# Altium PCB Battery_Charger_BQ24650.PcbDoc (part 2 of 2)
Units mm, origin at the board's own origin, x right, y up, seen from the top; angles counter-clockwise.
Board outline 55 x 60 mm, 2 copper layers (Top Layer, Bottom Layer), stack 1.135 mm thick; 79 components, 33 nets, 199 pads, 65 vias.
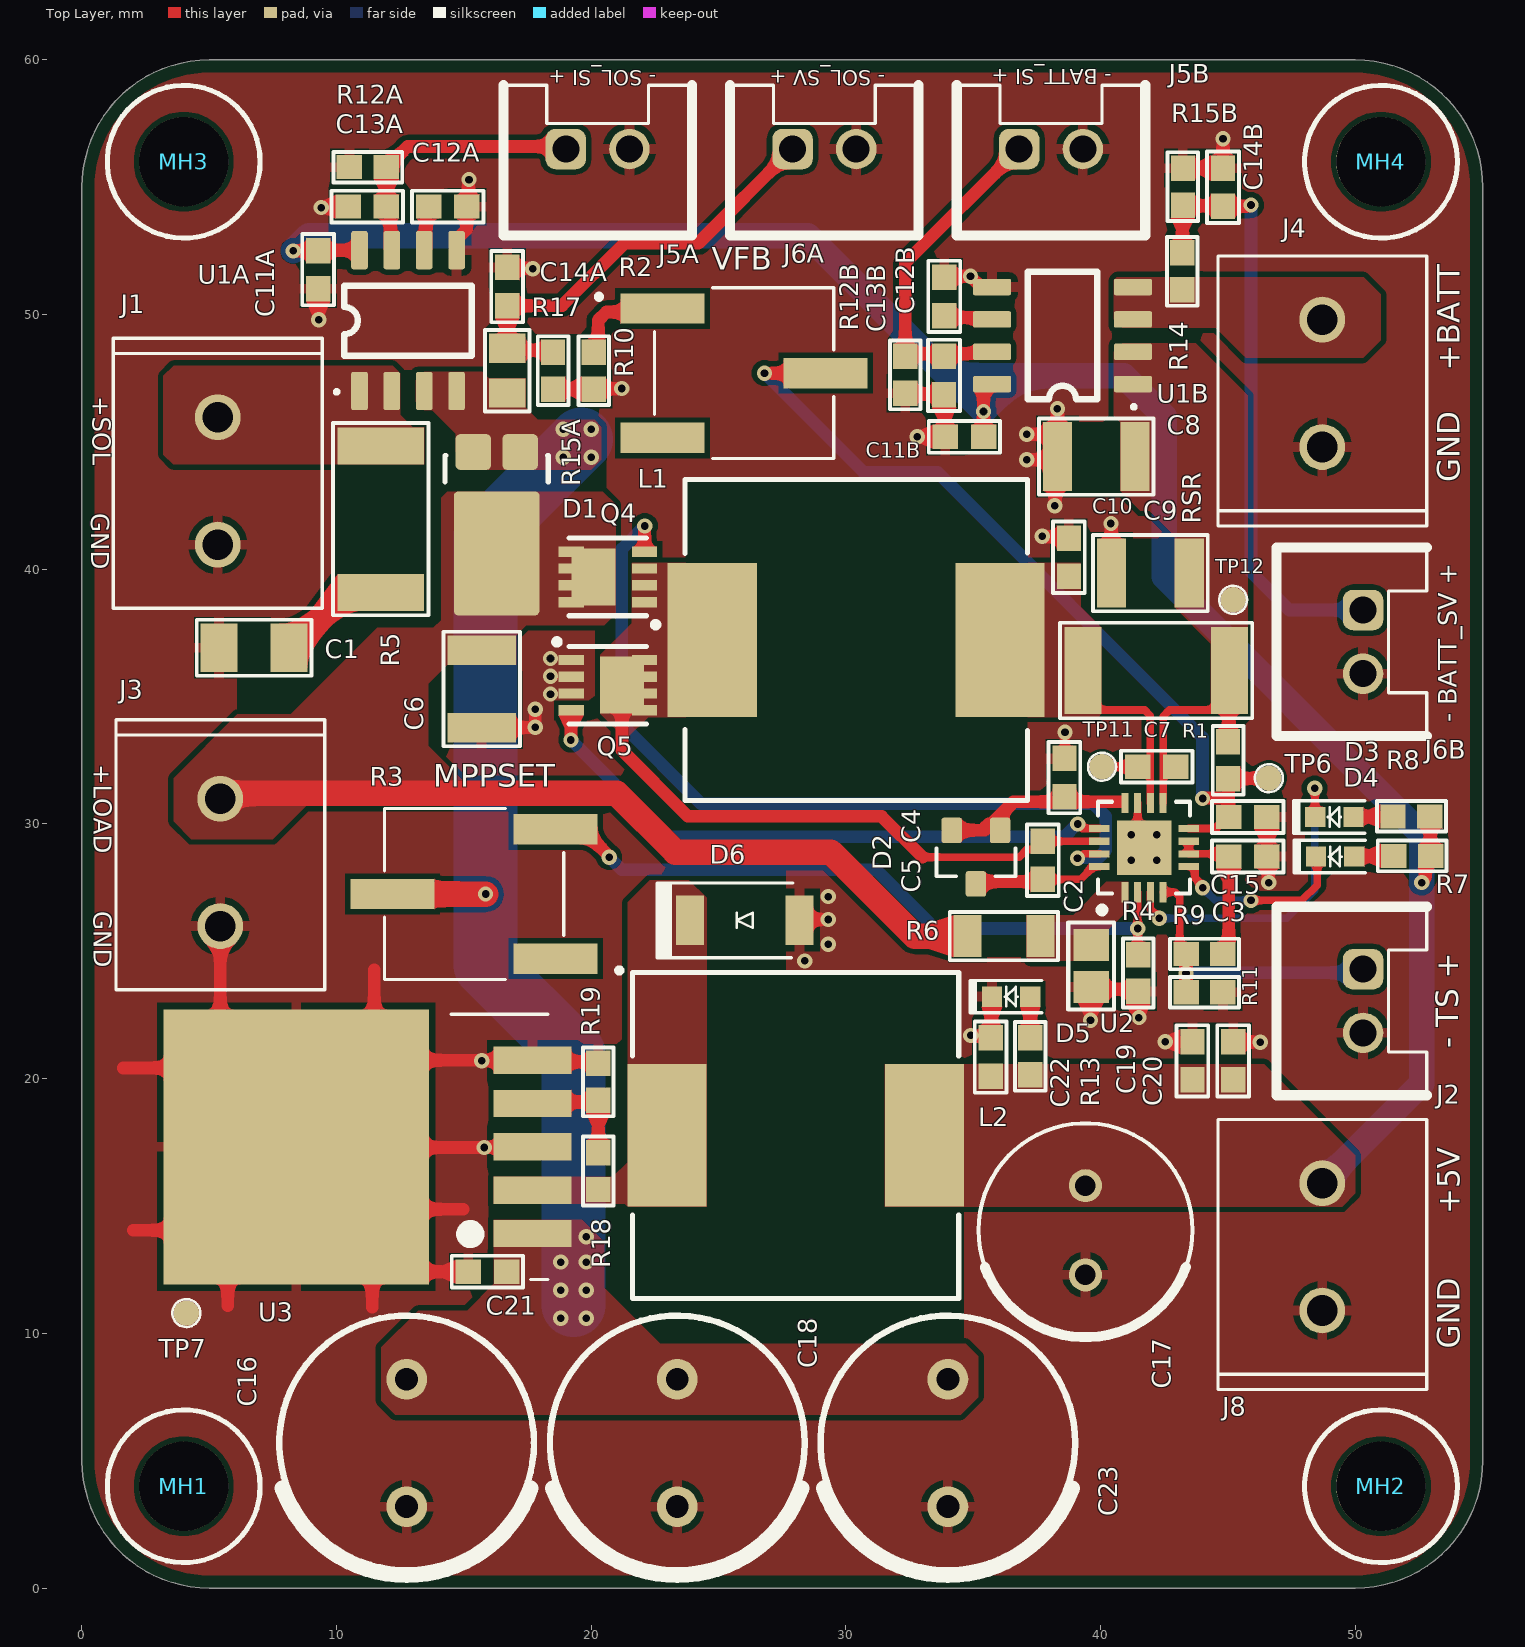
[diagram p0: Top Layer view]

## Part data (continued)
R11: library part "Res 430kΩ 0603(1608) 1% 0.1W_RMCF0603FT430K", "Res Thick Film 0603 430kΩ 1% 1/10W ±100ppm/°C Molded SMD SMD Paper T/R", Case Code (Imperial)=0603, Case Code (Metric)=1608, Manufacturer="Stackpole Electronics", Max Operating Temperature=155°C, Max Power Dissipation=100mW, Min Operating Temperature=-55°C, Package Quantity=5000, Supplier Part Number=RMCF0603FT430KCT-ND, Temperature Coefficient=100ppm/°C, Tolerance=1%, Voltage Rating=75V, Case/Package=0603, Category="Chip SMD Resistors", ComponentLink1Description=DataSheet, ComponentLink1URL=https://www.seielect.com/catalog/sei-rmcf_rmcp.pdf, ComponentLink2Description=Digikey, ComponentLink2URL=https://www.digikey.com/en/products/detail/stackpole-electronics-inc/RMCF0603FT430K/1714043, ComponentLink3Description=Mouser, ComponentLink3URL=https://eu.mouser.com/ProductDetail/SEI-Stackpole/RMCF0603FT430K?qs=IPgv5n7u5QYVDse0RIO5pw%3D%3D, Contact Plating=Tin,Matte, Features="Automotive AEC-Q200", Height=0.022inch, Length=0.061inch, Manufacturer Part Number=RMCF0603FT430K, Mounting Technology="Surface Mount", Number of Terminations=2, Packaging="Tape and Reel", Pricing="1=0.1, 10=0.015, 50=0.0092, 100=0.0075, 500=0.0049, 1000=0.00415 (USD)", Radiation Hardening=No, RoHS=Yes, RoHS Compliant=Yes, Series=RMCF, Stock=16624, Supplier=Digikey, Width=0.031inch
R12A R12B R14: library part "Res 10kΩ 0603(1608) 1% 0.1W_RK73H1JTTD1002F", "Resistor Thick Film 0603 10K Ohm 1% 1/10W ±100ppm/°C SMD Punched Paper Tape and Reel", Case Code (Imperial)=0603, Case Code (Metric)=1608, Manufacturer="KOA Speer", Max Operating Temperature=155°C, Max Power Dissipation=100mW, Min Operating Temperature=-55°C, Package Quantity=5000, Ratings=AEC-Q200, Resistance Tolerance=1%, Resistor Type="Thick Film", Supplier Part Number 1=2019-RK73H1JTTD1002FCT-ND, Temperature Coefficient=100ppm/°C, Voltage Rating=50V, Case/Package=0603, Category="Chip SMD Resistors", ComponentLink2Description=DataSheet, ComponentLink2URL=https://www.koaspeer.com/pdfs/RK73H.pdf, ComponentLink4Description=Digikey, ComponentLink4URL=https://www.digikey.com/en/products/detail/koa-speer-electronics-inc/RK73H1JTTD1002F/9844954, ComponentLink5Description=Mouser, ComponentLink5URL=https://eu.mouser.com/ProductDetail/KOA-Speer/RK73H1JTTD1002F?qs=%252BHd4ebZ%252Bq6V15kIYdKv25A%3D%3D, Construction=Rectangular, Depth=0.8mm, Features="Moisture Resistant,Automotive AEC-Q200", Height=0.45mm, Lead Free="Lead Free", Length=1.6mm, Manufacturer Part Number=RK73H1JTTD1002F, Military Standard=Not, Number of Terminations=2, Packaging="Tape and Reel", Pins=2, Power Rating=100mW, Pricing 1="1=0.1, 10=0.026, 100=0.0105, 1000=0.00472, 2500=0.0041 (USD)", Pricing 2="1=0.1, 10=0.013, 50=0.013, 100=0.008, 1000=0.005, 10000=0.004 (USD)", Reach SVHC Compliant=Unknown, RoHS=Yes, RoHS Compliant=Yes, Series=RK73H, Stock 1=3368554, Stock 2=680823, Supplier 1=Digi-Key, Supplier 2=Mouser, Supplier Part Number 2=660-RK73H1JTTD1002F, Termination=SMD/SMT, Tolerance=1%, Voltage Rating (DC)=50V, Width=0.8mm
R15A R15B: library part "Res 2kΩ 0603(1608) 0.5% 0.1W RC0603DR-072KL", "2 kOhms ±0.5% 0.1W, 1/10W Chip Resistor 0603 (1608 Metric) Moisture Resistant Thick Film", Case/Package=0603, Manufacturer=Yageo, Max Operating Temperature=155°C, Max Power Dissipation=100mW, Min Operating Temperature=-55°C, Supplier Part Number 1=13-RC0603DR-072KLCT-ND, Temperature Coefficient=100ppm/°C, Tolerance=0.5%, Category="Chip SMD Resistors", ComponentLink1Description=DataSheet, ComponentLink1URL=https://www.yageo.com/upload/media/product/productsearch/datasheet/rchip/PYu-RC_Group_51_RoHS_L_12.pdf, ComponentLink2Description=Digikey, ComponentLink2URL=https://www.digikey.com/en/products/detail/yageo/RC0603DR-072KL/5917988, Features="Moisture Resistant", Height=0.022inch, Length=0.063inch, Manufacturer Part Number=RC0603DR-072KL, Number of Terminations=2, Packaging="Tape and Reel", Pricing 1="1=0.1, 10=0.034, 50=0.0222, 100=0.0187, 500=0.01302, 1000=0.01133 (USD)", RoHS=Yes, RoHS Compliant=Yes, Series=RC, Stock 1=24993, Supplier 1=Digi-Key, Width=0.031inch
R17: library part "Res 24.9kΩ 0805(2012) 1% 1/4W_RK73H2ATTD2492F", "Res Thick Film 0805 24.9kΩ 1% 0.25W(1/4W) ±100ppm/C Pad SMD Automotive T/R", Case Code (Imperial)=0805, Case Code (Metric)=2012, Manufacturer="KOA Speer", Max Operating Temperature=155°C, Min Operating Temperature=-55°C, Package Quantity=5000, Power Rating=125mW, Supplier Part Number 1=2019-RK73H2ATTD2492FCT-ND, Temperature Coefficient=100ppm/°C, Tolerance=1%, Voltage Rating=150V, Case/Package=0805, Category="Chip SMD Resistors", ComponentLink1Description=DataSheet, ComponentLink1URL=https://www.koaspeer.com/pdfs/RK73H.pdf, ComponentLink2Description=Digikey, ComponentLink2URL=https://www.digikey.com/en/products/detail/koa-speer-electronics-inc/RK73H2ATTD2492F/10234069, ComponentLink3Description=Mouser, ComponentLink3URL=https://eu.mouser.com/ProductDetail/KOA-Speer/RK73H2ATTD2492F?qs=V1Gdg3MQOGsrJO3v1jKV%252Bg%3D%3D, Construction=Rectangular, Depth=1.25mm, Height=0.5mm, Lead Free="Lead Free", Length=2mm, Manufacturer Part Number=RK73H2ATTD2492F, Military Standard=Not, Packaging="Tape and Reel", Pricing 1="1=0.1, 10=0.031, 50=0.0192, 100=0.016, 500=0.0108, 1000=0.00929 (USD)", Pricing 2="1=0.1, 10=0.018, 50=0.018, 100=0.01, 1000=0.008, 10000=0.005 (USD)", RoHS=Yes, RoHS Compliant=Yes, Series=RK73H, Stock 1=15296, Stock 2=9628, Supplier 1=Digikey, Supplier 2=Mouser, Supplier Part Number 2=660-RK73H2ATTD2492F, Termination=SMD/SMT, Voltage Rating (DC)=150V, Width=1.25mm
R18: library part "Res 3kΩ 0603(1608) 0.5% 0.1W RT0603DRE073KL", "Res Thin Film 0603 3kΩ 0.5% 0.1W(1/10W) ±50ppm/C Pad SMD T/R", Case Code (Imperial)=0603, Case Code (Metric)=1608, Manufacturer=Yageo, Max Operating Temperature=155°C, Max Power Dissipation=100mW, Min Operating Temperature=-55°C, Supplier Part Number 1=311-2574-1-ND, Temperature Coefficient=50ppm/°C, Tolerance=0.5%, Voltage Rating=75V, Voltage Rating (DC)=50V, Case/Package=0603, Category="Chip SMD Resistors", ComponentLink1Description=DataSheet, ComponentLink1URL=https://www.yageo.com/upload/media/product/productsearch/datasheet/rchip/PYu-RT_1-to-0.01_RoHS_L_15.pdf, ComponentLink2Description=Digikey, ComponentLink2URL=https://www.digikey.com/en/products/detail/yageo/RT0603DRE073KL/1074848, Features="Moisture Resistant", Height=0.022inch, Lead Free="Lead Free", Length=0.063inch, Manufacturer Part Number=RT0603DRE073KL, Number of Terminations=2, Packaging="Tape and Reel", Power Rating=100mW, Pricing 1="1=0.11, 10=0.096, 100=0.037, 500=0.02292, 1000=0.01626, 2500=0.01404 (USD)", Pricing 2="1=0.11, 10=0.096, 50=0.096, 100=0.023, 1000=0.014, 10000=0.012 (USD)", RoHS=Yes, RoHS Compliant=Yes, Series=RT, Stock 1=9385, Stock 2=6302, Supplier 1=Digi-Key, Supplier 2=Mouser, Supplier Part Number 2=603-RT0603DRE073KL, Termination=SMD/SMT, Width=0.031inch
R19: library part "Res 1kΩ 0603(1608) 0.1% 0.1W_RN73R1JTTD1001B25", "Res Thin Film 0603 1kΩ 0.1% 0.1W(1/10W) ±25ppm/C Sulfur Resistant Pad SMD Automotive T/R", Case Code (Imperial)=0603, Case Code (Metric)=1608, Manufacturer="KOA Speer", Max Operating Temperature=155°C, Max Power Dissipation=100mW, Min Operating Temperature=-55°C, Supplier Part Number 1=2019-RN73R1JTTD1001B25CT-ND, Temperature Coefficient=25ppm/°C, Tolerance=0.1%, Case/Package=0603, Category="Chip SMD Resistors", ComponentLink1Description=DataSheet, ComponentLink1URL=https://www.koaspeer.com/pdfs/RN73R.pdf, ComponentLink2Description=Digikey, ComponentLink2URL=https://www.digikey.com/en/products/detail/koa-speer-electronics-inc/RN73R1JTTD1001B25/9991865, ComponentLink3Description=Mouser, ComponentLink3URL=https://eu.mouser.com/ProductDetail/KOA-Speer/RN73R1JTTD1001B25?qs=2WXlatMagcG9rUOLC1KorA%3D%3D, Features="Moisture Resistant", Manufacturer Part Number=RN73R1JTTD1001B25, Number of Terminations=2, Packaging="Cut Tape", Pricing 1="1=0.2, 10=0.146, 50=0.1144, 100=0.102, 500=0.07706, 1000=0.06788 (USD)", Pricing 2="1=0.2, 10=0.115, 50=0.115, 100=0.102, 1000=0.068, 10000=0.05 (USD)", RoHS=Yes, RoHS Compliant=Yes, Series=RN73R, Stock 1=20286, Stock 2=31590, Supplier 1=Digi-Key, Supplier 2=Mouser, Supplier Part Number 2=660-RN73R1JTD1001B25
RSR: library part "Res 0.01Ω 2512(6432) 1% 3W_CRA2512-FZ-R010ELF", "SMD Current Sense Resistor, 0.01Ω 1%, 3 W, 2512 [6432 Metric], Metal Alloy", Case/Package=348Case, Manufacturer=Bourns, Max Operating Temperature=170°C, Min Operating Temperature=-55°C, Supplier Part Number 1=CRA2512-FZ-R010ELFCT-ND, Tolerance=1%, Category="Chip SMD Resistors", ComponentLink1Description=DataSheet, ComponentLink1URL=https://www.bourns.com/docs/product-datasheets/cra.pdf, ComponentLink2Description=Digikey, ComponentLink2URL=https://www.digikey.com/en/products/detail/bourns-inc/CRA2512-FZ-R010ELF/1775029?s=N4IgTCBcDaIMICUCCYCsBGMBaAYgLSwQAZ0iBRAGRzgBUsA5AERAF0BfIA, ComponentLink3Description=Mouser, ComponentLink3URL=https://eu.mouser.com/ProductDetail/Bourns/CRA2512-FZ-R010ELF?qs=WqWCsLCZBkoNPiv%2FXVnYvw%3D%3D, Height=900um, Manufacturer Part Number=CRA2512-FZ-R010ELF, Packaging=13Packaging, Pins=2NUMBER, Pricing 1="1=0.64, 10=0.427, 25=0.3544, 50=0.3, 100=0.2245, 250=0.2, 500=0.16362, 1000=0.12726 (USD)", Pricing 2="1=0.64, 10=0.292, 50=0.292, 100=0.2, 1000=0.128, 10000=0.116 (USD)", RoHS=No, Stock 1=49784, Stock 2=36722, Supplier 1=Digikey, Supplier 2=Mouser, Supplier Part Number 2=652-CRA2512FZR010ELF, Width=3.2mm
TP6 TP7 TP11 TP12: library part "Misc. TP SMD 1mm DIA"
U1A U1B: library part "IC Current Sensor 5A Hall Effect SOIC-8_ACS723LLCTR-05AB-T", "High Accuracy, Galvanically Isolated Current Sensor IC With Small Footprint SOIC8 Package", Manufacturer="Allegro MicroSystems", Supplier Part Number 1=620-1641-1-ND, Bandwidth=80kHz, Category="Current Sensors", ComponentLink1Description=DataSheet, ComponentLink1URL=https://www.allegromicro.com/~/media/Files/Datasheets/ACS723-Datasheet.ashx, ComponentLink2Description=Digikey, ComponentLink2URL=https://www.digikey.com/en/products/detail/allegro-microsystems/ACS723LLCTR-05AB-T/4915376?s=N4IgTCBcDaIGxgAwFoCMcAsq3IHIBEQBdAXyA, ComponentLink3Description=Mouser, ComponentLink3URL=https://eu.mouser.com/ProductDetail/Allegro-MicroSystems/ACS723LLCTR-05AB-T?qs=pUKx8fyJudDgZZVdH2Guaw%3D%3D, Height=1.75mm, Manufacturer Part Number=ACS723LLCTR-05AB-T, Pricing 1="1=5.54, 5=4.668, 10=4.337, 25=3.936, 50=3.6574, 100=3.3989, 500=2.86738, 1000=2.66503 (USD)", Pricing 2="1=4.67, 10=3.65, 50=3.65, 100=3.4, 1000=2.67, 10000=2.39 (USD)", RoHS=Yes, RoHS Compliant=5897YesNo, Stock 1=6267, Stock 2=27382, Supplier 1=Digikey, Supplier 2=Mouser, Supplier Part Number 2=250-723LLCTR05ABT
U2: library part "IC Misc. Batt Charge_BQ24650RVAR", "Charger IC Multi-Chemistry 16-VQFN (3.5x3.5)", Manufacturer="Texas Instruments", Supplier Part Number 1=296-46287-1-ND, Category="Battery Management", ComponentLink1Description=DataSheet, ComponentLink1URL=https://www.ti.com/general/docs/suppproductinfo.tsp?distId=10&gotoUrl=https%3A%2F%2Fwww.ti.com%2Flit%2Fgpn%2Fbq24650, ComponentLink2Description=Digikey, ComponentLink2URL=https://www.digikey.com/en/products/detail/texas-instruments/BQ24650RVAR/2596772?s=N4IgTCBcDaIEIEUwBYBsBWADAJQGoEFsQBdAXyA, ComponentLink3Description=Mouser, ComponentLink3URL=https://eu.mouser.com/ProductDetail/Texas-Instruments/BQ24650RVAR?qs=0zjllh%252Bnl7YoFsOK3aOUFA%3D%3D, Manufacturer Part Number=BQ24650RVAR, Pricing 1="1=4.95, 10=4.442, 25=4.1996, 100=3.6396, 250=3.453, 500=3.09836, 1000=2.61307 (USD)", Pricing 2="1=4.94, 10=4.44, 50=4.44, 100=3.63, 1000=2.61, 10000=2.48 (USD)", RoHS=Yes, Stock 1=6655, Stock 2=7875, Supplier 1=Digi-Key, Supplier 2=Mouser, Supplier Part Number 2=595-BQ24650RVAR
U3: library part "IC PMU Buck 5V 3A TO-263_LM2596DSADJG", "Conv DC-DC 4.5V to 40V Step Down Single-Out 1.23V to 37V 3A 6-Pin(5+Tab) D2PAK Tube", Manufacturer="ON Semiconductor", Max Supply Voltage=40V, Min Supply Voltage=4.5V, Nominal Supply Current=5mA, Supplier Part Number=LM2596DSADJGOS-ND, Category="Voltage Regulators - Switching", ComponentLink1Description=DataSheet, ComponentLink1URL=https://www.onsemi.com/pdf/datasheet/lm2596-d.pdf, ComponentLink2Description=Digikey, ComponentLink2URL=https://www.digikey.com/en/products/detail/onsemi/LM2596DSADJG/2003290, ComponentLink3Description=Mouser, ComponentLink3URL=https://eu.mouser.com/ProductDetail/onsemi/LM2596DSADJG?qs=atIEnC%2F2K4W1Dy%252BFjrRjIQ%3D%3D, Halogen Free=5694HalogenFree, Lead Free=5697LeadFree, Manufacturer Part Number=LM2596DSADJG, Max Duty Cycle=95%, Pricing="1=3.53, 10=2.258, 50=1.7206, 100=1.5491, 250=1.36444, 500=1.25086, 1000=1.15572, 2500=1.09488 (USD)", RoHS=Yes, Stock=1605, Supplier=Digikey, Topology=6153TopologyType

## Via types
v1: diameter 0.6, hole 0.3, Top Layer to Bottom Layer, tented both sides, 61 vias
v2: diameter 0.3, hole 0.3, Top Layer to Bottom Layer, tented both sides, 4 vias

## Nets (pads, with @x,y where several pads share a name; then routed paths per layer and width w, separated by ;. In a path a pad name is that pad's centre, name@x,y a point inside that pad or via, vN(x,y) a via of type N, cw(c..) or ccw(c..) an arc to the next point about the centre after c; other vN are vias at no path point)
5V: C11A.1 C11B.1 C17.1 C19.2 C20.2 C22.2 J8.2 L2.1 R7.1 R8.1 R13.1 U1A.8 U1B.8 | length 86.8
  Top Layer w0.5: v1(8.3,52.5) 8.307,52.507 9.273,52.507 C11A.1 9.287,52.521 10.893,52.521 U1A.8 ; C11B.1 v1(35.4,46.198) 35.4,47.195 35.475,47.27 U1B.8 ; v1(52.6,27.7) 52.6,27.727 52.746,27.873 52.746,28.543 R7.1 ; R8.1 52.937,30.288 R7.1@52.937,28.76
  Bottom Layer w1: v1(8.3,52.5) 8.9,53.1 28.498,53.1 33.998,47.6 ; 37.25,47.6 36.802,47.6 ; J8.2 52.6,19.8 v1(52.6,27.7) 52.6,29.6 42.5,39.7 42.5,46 40.9,47.6 36.802,47.6 ; 33.998,47.6 35.479,47.6 ; 33.998,47.6 v1(35.4,46.198) ; v1(35.4,46.198) 36.802,47.6 ; v1(35.4,46.198) 35.4,47.521 35.479,47.6 ; 35.479,47.6 36.802,47.6
BTST: C5.1 D2.3 U2.16 | length 5.1
  Top Layer w0.3: C5.1 39.21,27.825 39.71,28.325 U2.16
  Top Layer w0.5: D2.3@35.1,27.738 37.637,27.738 C5.1
GND: C1.2 C2.2 C3.1 C4.1 C6.1 C8.1 C9.1 C10.1 C11A.2 C11B.2 C12A.1 C12B.1 C13A.1 C13B.1 C14A.1 C14B.1 C15.2 C16.2 C17.2 C18.2 C19.1 C20.1 C21.1 C22.1 C23.2 D5.2 D6.1 J1.2 J2.2 J3.2 J4.1 J5A.2 J5B.2 J6A.2 J6B.2 J8.1 Q5.1 Q5.2 Q5.3 R4.1 R10.2 R11.2 R12A.1 R12B.1 R15A.1 R15B.1 R19.2 TP7.1 U1A.5 U1B.5 U2.11 U2.17 U3.3 U3.5 U3.6 | length 115.6
  Top Layer w0.3: C4.1@38.575,32.375 C4.1@38.6,32.4 ; C4.1@38.6,32.6 v1(38.6,33.6) ; U2.11 41.45,29.325 U2.17
  Top Layer w0.5: 1.625,20.425 5.318,20.425 U3.6@5.435,20.308 ; 2.025,14.05 5.142,14.05 U3.6@5.725,14.633 ; J3.2@5.425,25.925 5.435,25.915 U3.6@5.435,20.308 ; 5.725,11.1 U3.6@5.725,14.633 ; C11A.2 9.28,49.847 9.3,49.827 v1(9.3,49.8) ; v1(9.4,54.2) 9.419,54.219 10.435,54.219 C13A.1 ; 11.4,11.025 U3.6@11.4,14.343 ; 11.475,24.275 U3.6@11.475,20.383 ; U1A.5 14.71,52.954 15.1,53.344 15.1,54.224 C12A.1 15.181,54.305 15.181,55.281 v1(15.2,55.3) ; 14.975,14.875 U3.6@10.868,14.875 ; C21.1 13.318,12.425 U3.6@11.4,14.343 ; v1(15.7,20.7) 15.713,20.713 17.679,20.713 U3.5 ; C6.1 15.712,33.787 17.787,33.787 v1(17.8,33.8) v1(17.8,34.5) ; C14A.1 16.731,51.819 17.681,51.819 v1(17.7,51.8) ; U3.3 17.679,17.313 15.813,17.313 v1(15.8,17.3) U3.6@8.443,17.3 ; v1(18.4,35.8) 18.427,35.8 v1@18.447,35.78 ; R15A.1 R10.2 20.112,47.088 21.188,47.088 v1(21.2,47.1) ; R19.2@20.287,20.613 R19.2 20.212,20.663 17.755,20.663 U3.5 ; D6.1 28.2,26.25 v1(29.3,26.25) ; R12B.1 32.348,46.885 33.823,46.885 C13B.1 33.874,46.834 33.874,45.226 C11B.2 v1(32.8,45.2) ; C12B.1 33.897,51.5 v1(34.89,51.5) 35.31,51.08 U1B.5 ; v1(34.9,21.7) 34.919,21.681 35.601,21.681 C22.1 35.707,21.625 35.707,23.2 D5.2 ; v1(37.1,44.3) 38.175,44.3 C8.1 ; v1(37.1,45.3) 37.975,45.3 C8.1@38.3,44.975 ; v1(37.7,41.3) 37.719,41.281 38.694,41.281 C10.1 ; v1(38.2,42.5) 38.219,42.519 38.219,44.344 C8.1 ; v1(38.3,46.3) C8.1@38.3,44.975 ; v1(39.6,22.3) 39.613,22.313 39.613,23.588 C2.2 39.713,23.513 41.387,23.513 R4.1 41.487,23.413 41.487,22.413 v1(41.5,22.4) ; v1(40.4,41.8) 40.412,41.788 40.412,39.863 C9.1 ; v1(42.538,21.448) C19.1@43.599,21.449 ; R15B.1 C14B.1 v1(44.8,56.9) ; C20.1 45.211,21.439 46.255,21.439 v1(46.266,21.429) ; C15.2 C3.1 46.581,28.669 46.581,27.719 v1(46.6,27.7) ; U3.6@5.435,20.308 U3.6 ; U3.6@5.725,14.633 U3.6 ; U3.6 U3.6@8.443,17.3 ; U3.6 U3.6@11.475,20.383 ; U3.6@8.443,17.3 U3.6@10.868,14.875 ; U3.6@10.868,14.875 U3.6@11.4,14.343 ; U3.6@11.475,20.383 11.817,20.725 U3.5 ; C8.1 C8.1@38.3,44.975
  other v1: 28.375,24.625 29.3,25.275 29.3,27.15 18.4,35.1 18.4,36.5
  other v2: 41.2,28.575 42.2,28.575 41.2,29.575 42.2,29.575
HIDRV: Q4.4 U2.15 | length 33.1
  Top Layer w0.3: v1(39.087,28.653) 39.168,28.653 39.34,28.825 U2.15
  Top Layer w0.5: Q4.4@22.092,40.8 22.092,41.692 v1(22.1,41.7)
  Bottom Layer w0.5: v1(22.1,41.7) 21.2,40.8 21.2,33.9 24.3,30.8 39.7,30.8 40.2,30.3 40.2,28.965 39.907,28.672 39.106,28.672 v1(39.087,28.653)
LODRV: Q5.4 U2.13 | length 23.7
  Top Layer w0.3: v1(39.1,30) 39.275,29.825 U2.13
  Top Layer w0.5: v1(19.2,33.3) 19.207,33.307 Q5.4@19.207,34.4
  Bottom Layer w0.5: v1(19.2,33.3) 23,29.5 38.573,29.5 39.073,30 v1(39.1,30)
MPPSET: R3.3 R4.2 U2.2 | length 26.9
  Top Layer w0.3: U2.2 v1(41.45,25.9) 41.45,24.9 R4.2
  Top Layer w0.5: R3.3 19.655,29.79 20.681,28.764 20.681,28.719 v1(20.7,28.7)
  Bottom Layer w0.5: v1(20.7,28.7) 21.2,28.2 31.2,28.2 33.5,25.9 v1(41.45,25.9)
NetC1_1: C1.1 R5.1 | length 4.6
  Top Layer w1: C1.1 8.135,37.143 8.36,37.368 8.668,37.368 10.168,38.868 11.51,38.868 R5.1
NetC2_1: C2.1 R6.1 U2.1
NetC6_2: C6.2 D1.3 J3.1 Q4.5 Q4.6 Q4.7 Q4.8 Q4.9 R6.2 | length 31.7
  Top Layer w1: J3.1@5.435,31.2 21,31.2 23.3,28.9 29.4,28.9 32.7,25.6 R6.2
NetC12A_2: C12A.2 U1A.6 | length 1.8
  Top Layer w0.5: U1A.6 13.515,52.604 13.515,54.139 C12A.2
NetC12B_2: C12B.2 U1B.6 | length 1.9
  Top Layer w0.5: C12B.2 33.932,49.885 35.66,49.885 U1B.6
NetC13A_2: C13A.2 J5A.1 R12A.2 U1A.7 | length 10.8
  Top Layer w0.5: U1A.7 12.095,52.604 12.095,54.099 C13A.2 R12A.2 11.98,55.789 12.791,56.6 J5A.1@19.04,56.6
NetC13B_2: C13B.2 J5B.1 R12B.2 U1B.7 | length 13.5
  Top Layer w0.5: U1B.7 35.66,48.465 33.848,48.465 32.428,48.465 R12B.2 32.323,52.023 J5B.1
NetC14A_2: C14A.2 J6A.1 R15A.2 R17.2 | length 17.3
  Top Layer w0.5: R15A.2 18.425,48.6 16.775,48.6 R17.2 C14A.2 18.85,50.35 21.3,52.8 24.2,52.8 J6A.1
NetC14B_2: C14B.2 J6B.1 R14.2 R15B.2 | length 24
  Top Layer w0.5: R14.2 43.212,52.437 43.212,54.287 R15B.2 43.25,54.275 44.775,54.275 C14B.2 45.823,54.25 45.873,54.3 v1(45.9,54.3)
  Bottom Layer w0.5: v1(45.9,54.3) 45.9,39.9 47.4,38.4 J6B.1
NetD3_1: D3.1 R8.2 | length 1.6
  Top Layer w0.5: D3.1 49.937,30.287 51.462,30.287 R8.2
NetD3_2: D3.2 U2.3 | length 12.9
  Top Layer w0.3: U2.3 41.95,26.65 v1(42.3,26.3) ; v1(48.4,31.4) 48.412,31.388 48.412,30.287 D3.2
  Bottom Layer w0.3: v1(42.3,26.3) 47.3,26.3 48.4,27.4 v1(48.4,31.4)
NetD4_1: D4.1 R7.2 | length 1.6
  Top Layer w0.5: D4.1 49.963,28.735 51.488,28.735 R7.2
NetD4_2: D4.2 U2.5 | length 7.3
  Top Layer w0.3: U2.5 43.69,28.325 U2.5@43.7,28.315 ; U2.5@43.7,28.3 U2.5@43.7,28.315 ; v1(44,27.5) 44,27.581 43.7,27.881 U2.5@43.7,28.315 ; v1(45.9,27) 47.9,27 48.5,27.6 48.5,28.673 D4.2
  Bottom Layer w0.3: v1(44,27.5) 44.5,27 v1(45.9,27)
NetD5_1: D5.1 R13.2 | length 1.6
  Top Layer w0.5: R13.2 D5.1
NetD6_2: D6.2 L2.2 R18.2 U3.2
NetJ4_2: J4.2 R14.1 U1B.3 U1B.4
NetR2_1: R2.1 R10.1 | length 4
  Top Layer w0.5: R10.1 20.275,48.7 20.275,49.775 20.6,50.1 22.66,50.1 R2.1
NetR18_1: R18.1 R19.1 U3.4 | length 4.7
  Top Layer w0.5: U3.4 17.755,19.088 20.212,19.088 R19.1 R18.1
PH: C5.2 L1.1 Q4.1 Q4.2 Q4.3 Q5.5 Q5.6 Q5.7 Q5.8 Q5.9 U2.14 | length 23.3
  Top Layer w0.3: 33,28.7 36.8,28.7 37.1,29 37.4,29 C5.2 ; C5.2@37.75,29.3 C5.2 ; U2.14 C5.2
  Top Layer w0.5: Q5.9 21.207,32.893 23.8,30.3 31.4,30.3 33,28.7
REGN: C4.2 D2.1 D2.2 U2.12 | length 7.2
  Top Layer w0.5: D2.2 35.45,29.75 35.45,29.85 35.6,30 35.7,30 36.575,30.875 U2.12@40.81,30.875
SRN: C7.1 C8.2 C9.2 R1.1 RSR.2 TP12.1 U1B.1 U1B.2 U2.9 | length 9.9
  Top Layer w0.3: U2.9 42.45,31.775 ; C7.1 42.925,32.25 42.45,31.775 ; RSR.2@45.05,35.05 44.475,34.475 42.7,34.475 42.45,34.225 42.45,31.775
  Top Layer w0.5: R1.1 45.025,33.25 45.025,36 RSR.2
SRP: C7.2 C10.2 L1.2 RSR.1 TP11.1 U2.10 | length 9.5
  Top Layer w0.3: RSR.1 39.3,35.05 39.875,34.475 41.725,34.475 41.95,34.25 C7.2@41.95,31.775 ; TP11.1 C7.2 41.475,32.25 C7.2@41.95,31.775 ; U2.10 C7.2@41.95,31.775
TS: J2.1 R9.2 R11.1 U2.4 | length 11.5
  Top Layer w0.3: U2.4 42.924,27.325 43.1,27.149 R9.2@43.1,24.925
  Top Layer w0.5: R11.1 v1(43.35,24.145) R9.2
  Bottom Layer w0.5: v1(43.35,24.145) 43.369,24.164 50.164,24.164 J2.1
VCC: C16.1 C18.1 C21.2 C23.1 D1.1 D1.2 R3.2 R17.1 U1A.3 U1A.4 U3.1 | length 40.6
  Top Layer w1: R3.2 v1(15.85,27.25)
  Bottom Layer w2.5: 19.3,11.1 19.3,13.8 19.3,21 15.85,24.45 15.85,41.35 19.6,45.1
  other v1: 18.8,10.6 19.8,10.6 18.8,11.7 19.8,11.7 18.8,12.8 19.8,12.8 19.8,13.8 18.9,44.4 20,44.4 18.9,45.5 20,45.5
VFB: C15.1 R1.2 R2.2 TP6.1 U2.8 | length 33.8
  Top Layer w0.3: U2.8 44.55,29.825 45,30.275 C15.1
  Top Layer w0.5: v1(26.8,47.7) R2.2 ; v1(44,31) 44.019,31.019 45.007,31.019 45.012,31.025 ; C15.1 45.012,30.287 45.012,31.025 ; TP6.1 46.587,31.788 45.012,31.788 R1.2 45.012,31.763 45.012,31.025
  Bottom Layer w0.5: v1(26.8,47.7) 30.7,43.8 33.6,43.8 44,33.4 v1(44,31)
VIN: J1.1 R5.2 U1A.1 U1A.2
Vref: C3.2 R9.1 U2.6 U2.7 | length 5.8
  Top Layer w0.3: U2.7@43.45,29.275 U2.6 C3.2@44.925,28.825 ; R9.1 R9.1@45.025,25.12
  Top Layer w0.5: R9.1@45.025,25.12 C3.2
pads on no net: MH1.1 MH2.1 MH3.1 MH4.1 R2.3 R3.1

## Polygon pours and split planes (outlines as drawn)
GND on Top Layer "GND_L01_P011" (solid, remove dead copper, pour order 11): 0,5 0,55 cw(c5,55) 5,60 50,60 cw(c50,55) 55,55 55,5 cw(c50,5) 50,0 5,0 cw(c5,5)
5V on Top Layer "5V_L01_P009" (solid, remove dead copper, pour order 9): 31.525,20.575 31.525,14.975 49.475,14.975 50,15.5 50,17 46.425,20.575 45.35,20.575
VCC on Top Layer "VCC_L01_P008" (solid, remove dead copper, pour order 8): 34.5,6.8 35.2,7.5 35.2,9.1 34.7,9.6 22.7,9.6 20.5,11.8 20.5,13.6 19.64,14.46 16.167,14.46 16.167,11.958 16.175,11.95 15.125,10.9 13.2,10.9 11.75,9.45 11.75,7.35 12.3,6.8
NetD6_2 on Top Layer "NETD6_2_L01_P007" (solid, remove dead copper, pour order 7): 23.825,27.8 22.3,27.8 21.425,26.925 21.425,16.725 20.85,16.15 16.177,16.15 16.167,16.16 16.167,15.09 21.31,15.09 21.425,14.975 24.525,14.975 24.525,27.1
NetC6_2 on Top Layer "NETC6_2_L01_P002" (solid, remove dead copper, pour order 2): 13.6,35.5 13.6,33.068 15.468,31.2 9.3,31.2 7.5,29.4 4.3,29.4 3.6,30.1 3.6,31.8 6.1,34.3 8.2,34.3 11.6,37.7 13.8,37.7 14.1,38 14.1,42.8 14.353,43.053 20.447,43.053 20.955,42.545 20.955,38.255 20.5,37.8 17.45,37.8 17.05,37.4 17.05,36.243 14.35,36.25
NetC2_1 on Top Layer "NETC2_1_L01_P010" (solid, remove dead copper, pour order 10): 41.09,27.725 41.09,26.64 40.325,25.875 40.325,24.625 37.23,24.625 37.08,24.775 37.08,26.425 38.925,26.425 40.225,27.725
SRN on Top Layer "SRN_L01_P005" (solid, remove dead copper, pour order 5): 45.775,34.325 45.775,46.825 43.735,48.865 40.84,48.865 40.515,48.54 40.515,46.035 40.775,45.775 40.775,43.075 41.55,42.3 41.9,42.3 42.9,41.3 42.9,38.5 44.325,37.075 44.325,34.325
SRP on Top Layer "SRP_L01_P006" (solid, remove dead copper, pour order 6): 34.3,34.2 39.9,34.2 40.025,34.325 40.025,37.725 39.225,38.525 39.225,40.225 39.2,40.25 34.3,40.25
NetJ4_2 on Top Layer "NETJ4_2_L01_P004" (solid, remove dead copper, pour order 4): 40.515,49.81 40.84,49.485 44.515,49.485 45.7,48.3 50.3,48.3 51,49 51,50.8 50.325,51.475 40.633,51.475 40.515,51.357
PH on Top Layer "PH_L01_P003" (solid, remove dead copper, pour order 3): 20.345,34.333 21.207,33.47 21.207,33.169 22.238,34.2 23.489,34.2 26.5,34.2 26.5,40.25 21.607,40.25 21.59,40.233 21.59,37.89 20.345,36.645
VCC on Top Layer "VCC_L01_P001" (solid, remove dead copper, pour order 1): 20.005,43.905 20.4,44.3 20.4,45.6 20.127,45.873 17.902,45.873 17.425,46.35 17.425,47.5 15.975,47.5 15.726,47.749 13.44,47.749 13.115,47.424 13.115,46.574 13.44,46.249 13.751,46.249 14.673,45.327 14.673,44.6 15.368,43.905
VIN on Top Layer "VIN_L01_P000" (solid, remove dead copper, pour order 0): 13.435,44.118 3.582,44.118 3.2,44.5 3.2,47.6 3.6,48 12.196,48 12.495,47.701 12.495,46.07 12.998,45.568 13.435,45.568
GND on Bottom Layer "GND_L02_P012" (solid, remove dead copper, pour order 12): 0,5 0,55 cw(c5,55) 5,60 50,60 cw(c50,55) 55,55 55,5 cw(c50,5) 50,0 5,0 cw(c5,5)

## Other copper
Top Layer:
  pour cut-out: 20.141,36.645 20.141,37.616 20.15,37.625 20.25,37.625 20.25,36.77 20.145,36.665
  pour cut-out: 48.025,30.875 48.025,28.123 49.75,28.123 49.525,28.348 49.525,30.875
  pour cut-out: 20.592,44.992 20.592,43.197 20.203,43.197 20.1,43.3 20.149,43.349 20.149,43.833 20.498,44.182 20.498,44.898
  pour cut-out: 13.9,39.818 13.9,44.118 9.835,44.118 9.835,39.818
  pour cut-out: 41,38.5 42.9,38.5 42.9,41.2 41,41.2
  pour cut-out: 38.875,42.821 40.775,42.821 40.775,45.775 38.875,45.775
  pour cut-out: 6.11,34.5 7.41,34.5 7.41,38.122 6.11,38.122
  pour cut-out: 27.625,24.2 24.625,24.2 24.625,28.2 27.625,28.2
  pour cut-out: 35.32,24.789 37.066,24.789 37.08,24.775 37.08,26.425 35.32,26.425
  pour cut-out: 14.35,34.35 14.35,36.25 17.043,36.25 17.304,35.989 17.304,34.35
  pour cut-out: 23.1,9.8 34.625,9.8 34.625,14.975 31.525,14.975 31.525,20.575 34.421,20.575 34.421,24.179 34.4,24.2 24.6,24.2 24.6,15.05 24.525,14.975 21.628,14.975 21.628,11.386
  pour cut-out: 23.7,30.9 37.138,30.9 37.138,43.5 23.7,43.5
  text "Layer 1 (Top)" at 59.08,46.292 h1.27
Bottom Layer:
  text "Layer 2 (Bottom)" at 59.18,39.527 h1.27

## Silkscreen, mask and mechanical layers (free items; w line width, h text height)
Top Overlay:
  text "- BATT_SI +" at 40.425,59.822 h1 r180
  text "- SOL_SI +" at 22.55,59.797 h1 r180
  text "- SOL_SV +" at 31.55,59.797 h1 r180
  text "VFB" at 24.726,51.475 h1.52
  text "+BATT" at 54.4,47.8 h1.52 r90
  text "+SOL" at 0.188,46.8 h1.2 r270
  text "GND" at 54.383,43.425 h1.52 r90
  text "GND" at 0.138,42.2 h1.2 r270
  text "- BATT_SV +" at 54.227,34 h1.25 r90
  text "Silk Screen 1 (Top)" at 59.18,32.72 h1.27
  text "+LOAD" at 0.238,32.35 h1.2 r270
  text "MPPSET" at 13.8,31.167 h1.52
  text "GND" at 0.238,26.575 h1.2 r270
  text "- TS +" at 54.333,21.2 h1.52 r90
  text "+5V" at 54.383,14.675 h1.52 r90
  text "GND" at 54.383,9.4 h1.52 r90
Top Solder:
  text "Solder Mask 1 (Top)" at 59.18,37.258 h1.27
Bottom Solder:
  text "Solder Mask 2 (Bottom)" at 59.18,34.989 h1.27
BOARD:
  the board outline again, w0.254
  text "Board Dimensions" at 59.18,26.154 h1.27
  text "Board CutOuts V-CUT" at 59.18,24.109 h1.27
  text "Board Shape" at 59.18,21.854 h1.27
Top 3D Body:
  text "Component 3D Body (Top)" at 59.18,30.451 h1.27
Bottom 3D Body:
  text "Component 3D Body (Bottom)" at 59.18,28.181 h1.27
Top Assembly:
  text "Top Assembly" at 59,15.025 h1.27
Drill Drawing:
  circle w0.254: c-10.444,75.8 r0.847
  lines w0.254: -11.291,71.144 -10.444,71.567 -9.597,71.144 -10.021,71.99 -9.597,72.837 -10.444,72.413 -11.291,72.837 -10.867,71.99 -11.291,71.144 ; -11.291,78.764 -9.597,78.764 -9.597,80.457 -11.291,80.457 -11.291,78.764 ; -11.291,82.997 -10.867,82.997 -10.444,82.574 -10.021,82.997 -9.597,82.997 -10.021,83.42 -9.597,83.843 -10.021,83.843 -10.444,84.267 -10.867,83.843 -11.291,83.843 -10.867,83.42 -11.291,82.997 ; -11.291,86.807 -10.867,86.807 -10.867,86.384 -10.021,86.384 -10.021,86.807 -9.597,86.807 -9.597,87.653 -10.021,87.653 -10.021,88.077 -10.867,88.077 -10.867,87.653 -11.291,87.653 -11.291,86.807 ; -11.291,91.887 -9.597,91.887 -10.444,90.194 -11.291,91.887
  lines w0.381: -12.809,70.001 254.68,70.001 ; -12.809,92.861 254.68,92.861 ; 1.183,66.191 1.183,96.671 ; 14.895,66.191 14.895,96.671 ; 44.097,66.191 44.097,96.671 ; 56.946,66.191 56.946,96.671 ; 75.584,66.191 75.584,96.671 ; 113.673,66.191 113.673,96.671 ; 128.655,66.191 128.655,96.671 ; 147.598,66.191 147.598,96.671 ; 164.104,66.191 164.104,96.671 ; 185.79,66.191 185.79,96.671 ; 219.663,66.191 219.663,96.671 ; -12.809,66.191 254.68,66.191 254.68,96.671 -12.809,96.671 -12.809,66.191
  text "Symbol" at -10.523,94.004 h1.83
  text "Count" at 2.326,94.004 h1.83
  text "Hole Size" at 16.038,94.004 h1.83
  text "Plated" at 45.24,94.004 h1.83
  text "Hole Type" at 58.089,94.004 h1.83
  text "Drill Layer Pair" at 76.727,94.004 h1.83
  text "Via/Pad" at 114.816,94.004 h1.83
  text "Pad Shape" at 129.798,94.004 h1.83
  text "Template" at 148.741,94.004 h1.83
  text "Description" at 165.247,94.004 h1.83
  text "Hole Tolerance (+)" at 186.933,94.004 h1.83
  text "Hole Tolerance (-)" at 220.806,94.004 h1.83
  text "2" at 2.326,90.194 h1.52
  text "0.800mm (31.50mil)" at 16.038,90.194 h1.52
  text "PTH" at 45.24,90.194 h1.52
  text "Round" at 58.089,90.194 h1.52
  text "Top Layer - Bottom Layer" at 76.727,90.194 h1.52
  text "Pad" at 114.816,90.194 h1.52
  text "Rounded" at 129.798,90.194 h1.52
  text "c130h80" at 148.741,90.194 h1.52
  text "4" at 2.326,86.384 h1.52
  text "3.500mm (137.79mil)" at 16.038,86.384 h1.52
  text "NPTH" at 45.24,86.384 h1.52
  text "Round" at 58.089,86.384 h1.52
  text "Top Layer - Bottom Layer" at 76.727,86.384 h1.52
  text "Pad" at 114.816,86.384 h1.52
  text "Rounded" at 129.798,86.384 h1.52
  text "c350hn350" at 148.741,86.384 h1.52
  text "6" at 2.326,82.574 h1.52
  text "0.900mm (35.43mil)" at 16.038,82.574 h1.52
  text "PTH" at 45.24,82.574 h1.52
  text "Round" at 58.089,82.574 h1.52
  text "Top Layer - Bottom Layer" at 76.727,82.574 h1.52
  text "Pad" at 114.816,82.574 h1.52
  text "Rounded" at 129.798,82.574 h1.52
  text "c160h90" at 148.741,82.574 h1.52
  text "8" at 2.326,78.764 h1.52
  text "1.200mm (47.24mil)" at 16.038,78.764 h1.52
  text "PTH" at 45.24,78.764 h1.52
  text "Round" at 58.089,78.764 h1.52
  text "Top Layer - Bottom Layer" at 76.727,78.764 h1.52
  text "Pad" at 114.816,78.764 h1.52
  text "Rounded" at 129.798,78.764 h1.52
  text "c180h120" at 148.741,78.764 h1.52
  text "10" at 2.326,74.954 h1.52
  text "1.060mm (41.73mil)" at 16.038,74.954 h1.52
  text "PTH" at 45.24,74.954 h1.52
  text "Round" at 58.089,74.954 h1.52
  text "Top Layer - Bottom Layer" at 76.727,74.954 h1.52
  text "Pad" at 114.816,74.954 h1.52
  text "(Mixed)" at 129.798,74.954 h1.52
  text "(Mixed)" at 148.741,74.954 h1.52
  text "65" at 2.326,71.144 h1.52
  text "0.300mm (11.81mil)" at 16.038,71.144 h1.52
  text "PTH" at 45.24,71.144 h1.52
  text "Round" at 58.089,71.144 h1.52
  text "Top Layer - Bottom Layer" at 76.727,71.144 h1.52
  text "Via" at 114.816,71.144 h1.52
  text "Rounded" at 129.798,71.144 h1.52
  text "(Mixed)" at 148.741,71.144 h1.52
  text "95 Total" at 2.326,67.334 h1.52

## Dimensions
5,0 to 5,60 on BOARD
0,5 to 55,5 on BOARD